# EAGLE board RoboRio LED schematic (EAGLE 7.1.0)
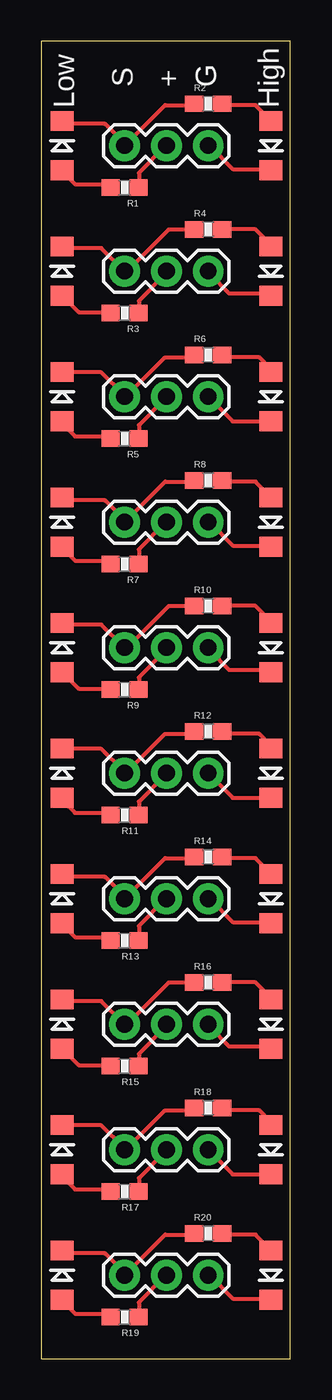
[diagram p0: board, top side]

Size 15.16 x 80 mm. Coordinates in mm from the lower left corner, seen from the top.
Outline: 0,0 15.16,0 15.16,80 0,80 0,0
Copper layers (1*16): Top 0.035mm / dielectric 1.5mm / Bottom 0.035mm
Design rules "default": minimum track width 10mil, minimum drill 24mil, track to track 8mil, track to pad 8mil, pad to pad 8mil, via to via 8mil, smd to smd 8mil, copper to edge 40mil, drill to drill 8mil, minimum pad ring 10mil, minimum via ring 8mil, stop-mask expansion 4mil, vias tented up to drill 0mil, thermal gap 10mil

## Footprints (pad centres in the part's own frame; a part is rotated, then mirrored left to right if it is on the bottom)
LED-1206 = smd 1.2 x 1.4: A -1.5,0; C 1.5,0
1X03 = drill 1.016 pad 1.88: 1 0,0; 2 2.54,0; 3 5.08,0
0603-RES = smd 1.1 x 1: 1 -0.85,0; 2 0.85,0

## Placement (x,y rotation side)
D1  [LED-1206]  1.27,73.66 90 top
D2  [LED-1206]  13.97,73.66 270 top
D3  [LED-1206]  1.27,66.04 90 top
D4  [LED-1206]  13.97,66.04 270 top
D5  [LED-1206]  1.27,58.42 90 top
D6  [LED-1206]  13.97,58.42 270 top
D7  [LED-1206]  1.27,50.8 90 top
D8  [LED-1206]  13.97,50.8 270 top
D9  [LED-1206]  1.27,43.18 90 top
D10  [LED-1206]  13.97,43.18 270 top
D11  [LED-1206]  1.27,35.56 90 top
D12  [LED-1206]  13.97,35.56 270 top
D13  [LED-1206]  1.27,27.94 90 top
D14  [LED-1206]  13.97,27.94 270 top
D15  [LED-1206]  1.27,20.32 90 top
D16  [LED-1206]  13.97,20.32 270 top
D17  [LED-1206]  1.27,12.7 90 top
D18  [LED-1206]  13.97,12.7 270 top
D19  [LED-1206]  1.27,5.08 90 top
D20  [LED-1206]  13.97,5.08 270 top
J1  [1X03]  10.16,73.66 180 top
J2  [1X03]  10.16,66.04 180 top
J3  [1X03]  10.16,58.42 180 top
J4  [1X03]  10.16,50.8 180 top
J5  [1X03]  10.16,43.18 180 top
J6  [1X03]  10.16,35.56 180 top
J7  [1X03]  10.16,27.94 180 top
J8  [1X03]  10.16,20.32 180 top
J9  [1X03]  10.16,12.7 180 top
J10  [1X03]  10.16,5.08 180 top
R1  [0603-RES]  5.08,71.12 180 top
R2  [0603-RES]  10.16,76.2 0 top
R3  [0603-RES]  5.08,63.5 180 top
R4  [0603-RES]  10.16,68.58 0 top
R5  [0603-RES]  5.08,55.88 180 top
R6  [0603-RES]  10.16,60.96 0 top
R7  [0603-RES]  5.08,48.26 180 top
R8  [0603-RES]  10.16,53.34 0 top
R9  [0603-RES]  5.08,40.64 180 top
R10  [0603-RES]  10.16,45.72 0 top
R11  [0603-RES]  5.08,33.02 180 top
R12  [0603-RES]  10.16,38.1 0 top
R13  [0603-RES]  5.08,25.4 180 top
R14  [0603-RES]  10.16,30.48 0 top
R15  [0603-RES]  5.08,17.78 180 top
R16  [0603-RES]  10.16,22.86 0 top
R17  [0603-RES]  5.08,10.16 180 top
R18  [0603-RES]  10.16,15.24 0 top
R19  [0603-RES]  5.08,2.54 180 top
R20  [0603-RES]  10.16,7.62 0 top

## Library data of the parts
D1-D20 = LilyPad-Wearables
J1-J10 = SparkFun-Connectors
R1-R20 = SparkFun-Passives

## Nets
GND: D2.C J1.1
GND1: D4.C J2.1
GND2: D6.C J3.1
GND3: D8.C J4.1
GND4: D10.C J5.1
GND5: D12.C J6.1
GND6: D14.C J7.1
GND7: D16.C J8.1
GND8: D18.C J9.1
GND9: D20.C J10.1
N$1: J1.2 R1.1
N$2: D1.A R1.2
N$3: J2.2 R3.1
N$4: D2.A R2.2
N$5: D4.A R4.2
N$6: D3.A R3.2
N$7: J3.2 R5.1
N$8: D6.A R6.2
N$9: D5.A R5.2
N$10: J4.2 R7.1
N$11: D8.A R8.2
N$12: D7.A R7.2
N$13: J5.2 R9.1
N$14: D10.A R10.2
N$15: D9.A R9.2
N$16: J6.2 R11.1
N$17: D12.A R12.2
N$18: D11.A R11.2
N$19: J7.2 R13.1
N$20: D14.A R14.2
N$21: D13.A R13.2
N$22: J8.2 R15.1
N$23: D16.A R16.2
N$24: D15.A R15.2
N$25: J9.2 R17.1
N$26: D18.A R18.2
N$27: D17.A R17.2
N$28: J10.2 R19.1
N$29: D20.A R20.2
N$30: D19.A R19.2
S: D1.C J1.3 R2.1
S1: D3.C J2.3 R4.1
S2: D5.C J3.3 R6.1
S3: D7.C J4.3 R8.1
S4: D9.C J5.3 R10.1
S5: D11.C J6.3 R12.1
S6: D13.C J7.3 R14.1
S7: D15.C J8.3 R16.1
S8: D17.C J9.3 R18.1
S9: D19.C J10.3 R20.1

## Tracks (layer width: path | path; a pad name or v marks a point on that pad's centre or on a via)
GND
  Top 0.254: D2.C 13.95,72.24 11.66,72.24 10.29,73.61 J1.1
GND1
  Top 0.254: D4.C 13.95,64.69 11.43,64.69 10.29,65.84 J2.1
GND2
  Top 0.254: J3.1 11.66,56.92 13.95,56.92 D6.C
GND3
  Top 0.254: D8.C 13.95,49.38 11.66,49.38 10.29,50.75 J4.1
GND4
  Top 0.254: D10.C 13.95,41.83 11.43,41.83 10.29,42.98 J5.1
GND5
  Top 0.254: J6.1 11.66,34.06 13.95,34.06 D12.C
GND6
  Top 0.254: D14.C 13.95,26.52 11.66,26.52 10.29,27.89 J7.1
GND7
  Top 0.254: D16.C 13.95,18.97 11.43,18.97 10.29,20.12 J8.1
GND8
  Top 0.254: J9.1 11.66,11.2 13.95,11.2 D18.C
GND9
  Top 0.254: D20.C 13.95,3.66 11.66,3.66 10.29,5.03 J10.1
N$1
  Top 0.254: R1.1 5.94,71.32 5.94,72.01 7.54,73.61 J1.2
N$2
  Top 0.254: R1.2 4.12,71.32 2.06,71.32 1.37,72.01 D1.A
N$3
  Top 0.254: R3.1 5.94,63.55 5.94,64.24 7.54,65.84 J2.2
N$4
  Top 0.254: R2.2 11.2,76.12 13.03,76.12 13.95,75.21 D2.A
N$5
  Top 0.254: R4.2 13.03,68.58 13.95,67.67 D4.A
N$6
  Top 0.254: R3.2 4.12,63.55 2.29,63.55 1.37,64.47 D3.A
N$7
  Top 0.254: R5.1 5.94,56.01 5.94,56.69 7.54,58.29 J3.2
N$8
  Top 0.254: R6.2 11.2,60.81 13.26,60.81 13.95,60.12 D6.A
N$9
  Top 0.254: R5.2 4.12,56.01 2.06,56.01 1.37,56.69 D5.A
N$10
  Top 0.254: R7.1 5.94,48.46 5.94,49.15 7.54,50.75 J4.2
N$11
  Top 0.254: R8.2 11.2,53.26 13.03,53.26 13.95,52.35 D8.A
N$12
  Top 0.254: R7.2 4.12,48.46 2.06,48.46 1.37,49.15 D7.A
N$13
  Top 0.254: R9.1 5.94,40.69 5.94,41.38 7.54,42.98 J5.2
N$14
  Top 0.254: R10.2 13.03,45.72 13.95,44.81 D10.A
N$15
  Top 0.254: R9.2 4.12,40.69 2.29,40.69 1.37,41.6 D9.A
N$16
  Top 0.254: R11.1 5.94,33.15 5.94,33.83 7.54,35.43 J6.2
N$17
  Top 0.254: R12.2 11.2,37.95 13.26,37.95 13.95,37.26 D12.A
N$18
  Top 0.254: R11.2 4.12,33.15 2.06,33.15 1.37,33.83 D11.A
N$19
  Top 0.254: R13.1 5.94,25.6 5.94,26.29 7.54,27.89 J7.2
N$20
  Top 0.254: R14.2 11.2,30.4 13.03,30.4 13.95,29.49 D14.A
N$21
  Top 0.254: R13.2 4.12,25.6 2.06,25.6 1.37,26.29 D13.A
N$22
  Top 0.254: R15.1 5.94,17.83 5.94,18.52 7.54,20.12 J8.2
N$23
  Top 0.254: R16.2 13.03,22.86 13.95,21.95 D16.A
N$24
  Top 0.254: R15.2 4.12,17.83 2.29,17.83 1.37,18.75 D15.A
N$25
  Top 0.254: R17.1 5.94,10.29 5.94,10.97 7.54,12.57 J9.2
N$26
  Top 0.254: R18.2 11.2,15.09 13.26,15.09 13.95,14.4 D18.A
N$27
  Top 0.254: R17.2 4.12,10.29 2.06,10.29 1.37,10.97 D17.A
N$28
  Top 0.254: R19.1 5.94,2.74 5.94,3.43 7.54,5.03 J10.2
N$29
  Top 0.254: R20.2 11.2,7.54 13.03,7.54 13.95,6.63 D20.A
N$30
  Top 0.254: R19.2 4.12,2.74 2.06,2.74 1.37,3.43 D19.A
S
  Top 0.254: R2.1 9.14,76.12 7.54,76.12 J1.3 5.03,73.84 3.89,74.98 1.37,74.98 D1.C
S1
  Top 0.254: R4.1 7.77,68.58 5.26,66.06 J2.3 5.03,66.06 3.66,67.44 1.37,67.44 D3.C
S2
  Top 0.254: R6.1 9.14,60.81 7.54,60.81 5.26,58.52 J3.3 5.03,58.52 3.66,59.89 1.37,59.89 D5.C
S3
  Top 0.254: R8.1 9.14,53.26 7.54,53.26 J4.3 5.03,50.98 3.89,52.12 1.37,52.12 D7.C
S4
  Top 0.254: R10.1 7.77,45.72 5.26,43.2 J5.3 5.03,43.2 3.66,44.58 1.37,44.58 D9.C
S5
  Top 0.254: R12.1 9.14,37.95 7.54,37.95 5.26,35.66 J6.3 5.03,35.66 3.66,37.03 1.37,37.03 D11.C
S6
  Top 0.254: R14.1 9.14,30.4 7.54,30.4 J7.3 5.03,28.12 3.89,29.26 1.37,29.26 D13.C
S7
  Top 0.254: R16.1 7.77,22.86 5.26,20.34 J8.3 5.03,20.34 3.66,21.72 1.37,21.72 D15.C
S8
  Top 0.254: R18.1 9.14,15.09 7.54,15.09 5.26,12.8 J9.3 5.03,12.8 3.66,14.17 1.37,14.17 D17.C
S9
  Top 0.254: R20.1 9.14,7.54 7.54,7.54 J10.3 5.03,5.26 3.89,6.4 1.37,6.4 D19.C

## Text on the board
tPlace: S | + | G | Low | High